# Altium PCB NewPower.PcbDoc
Units mil, origin at the board's own origin, x right, y up, seen from the top; angles counter-clockwise.
Board outline 2880 x 3365 mil, 2 copper layers (Top Layer, Bottom Layer); 28 components, 17 nets, 80 pads, 17 vias.
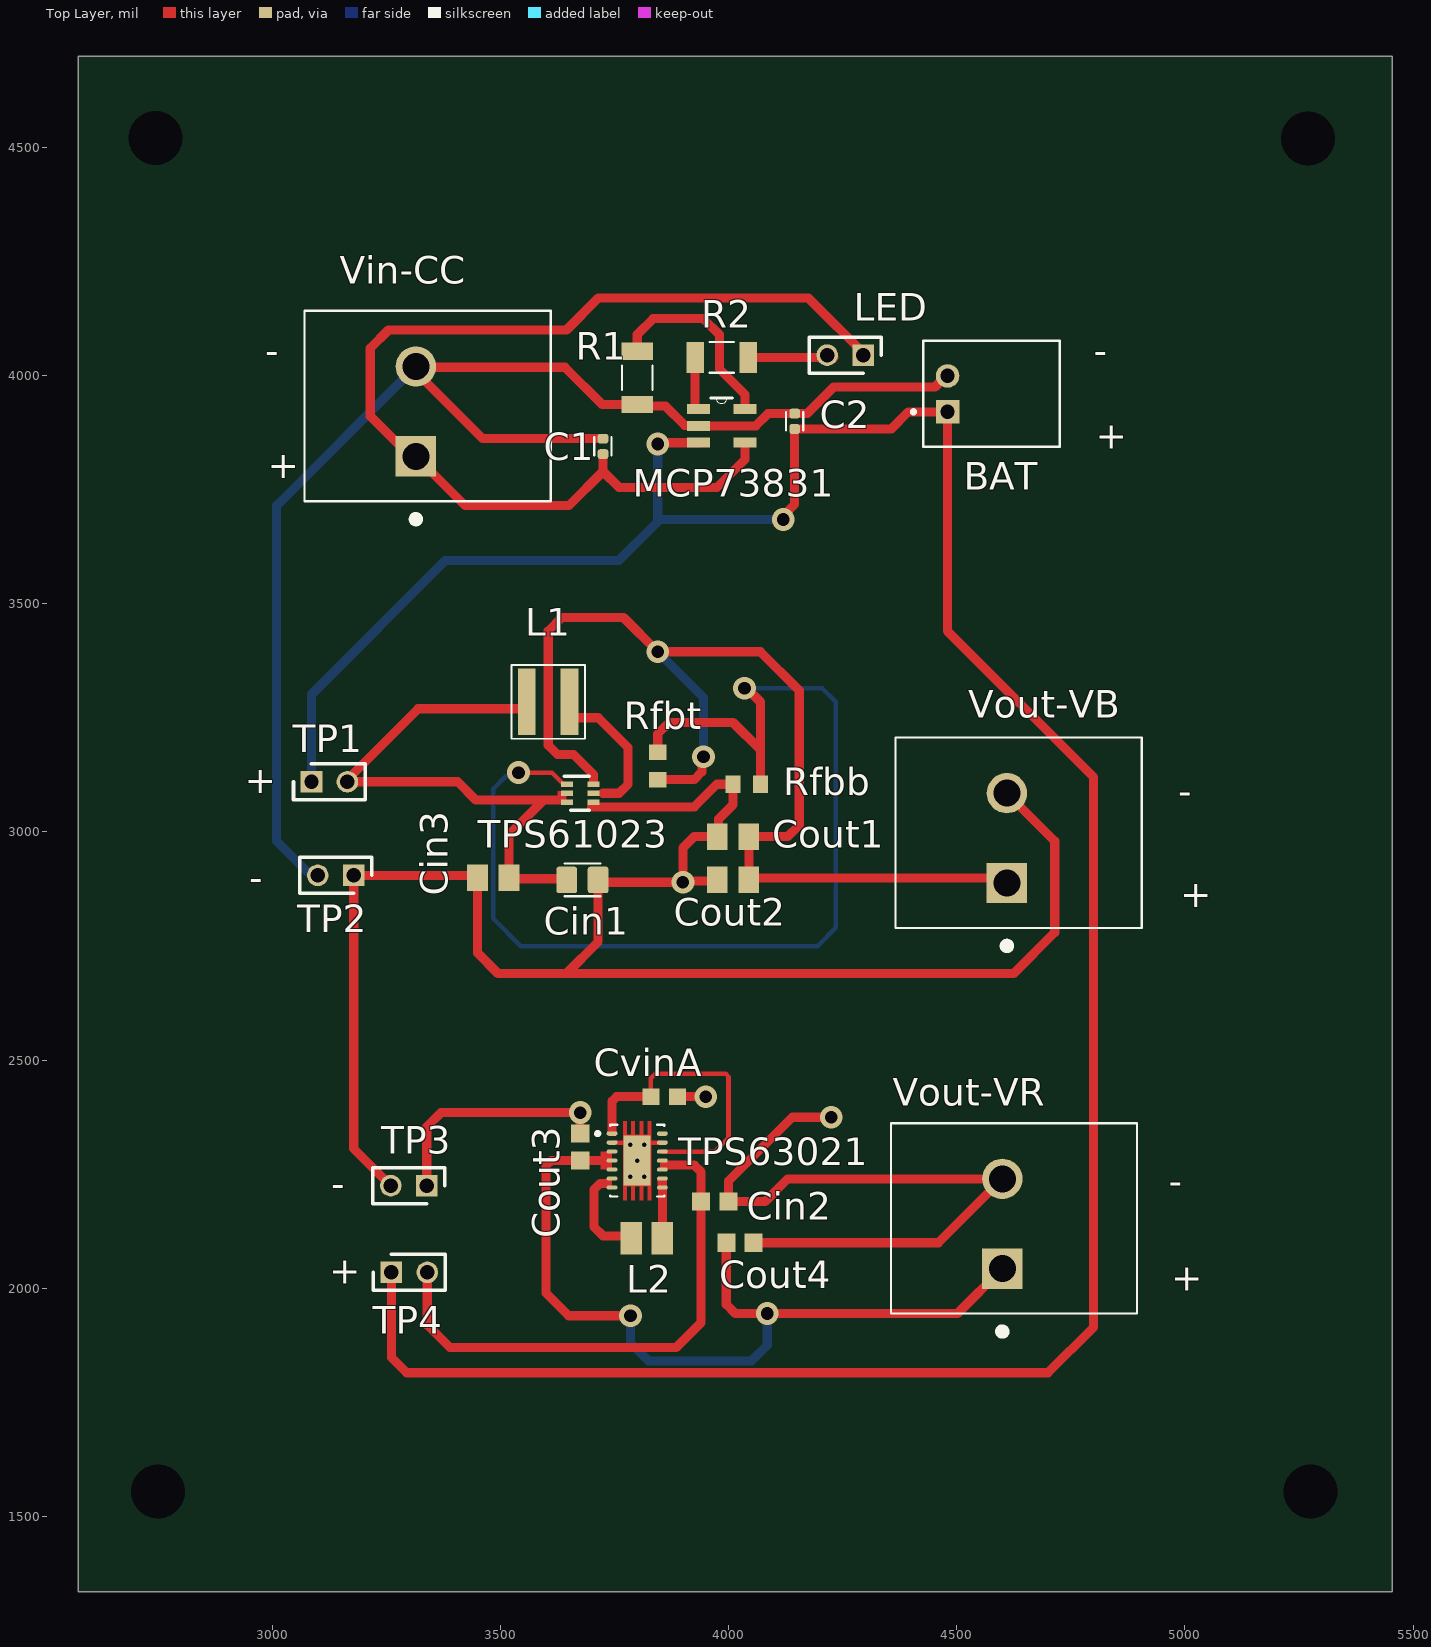
[diagram p0: Top Layer view]
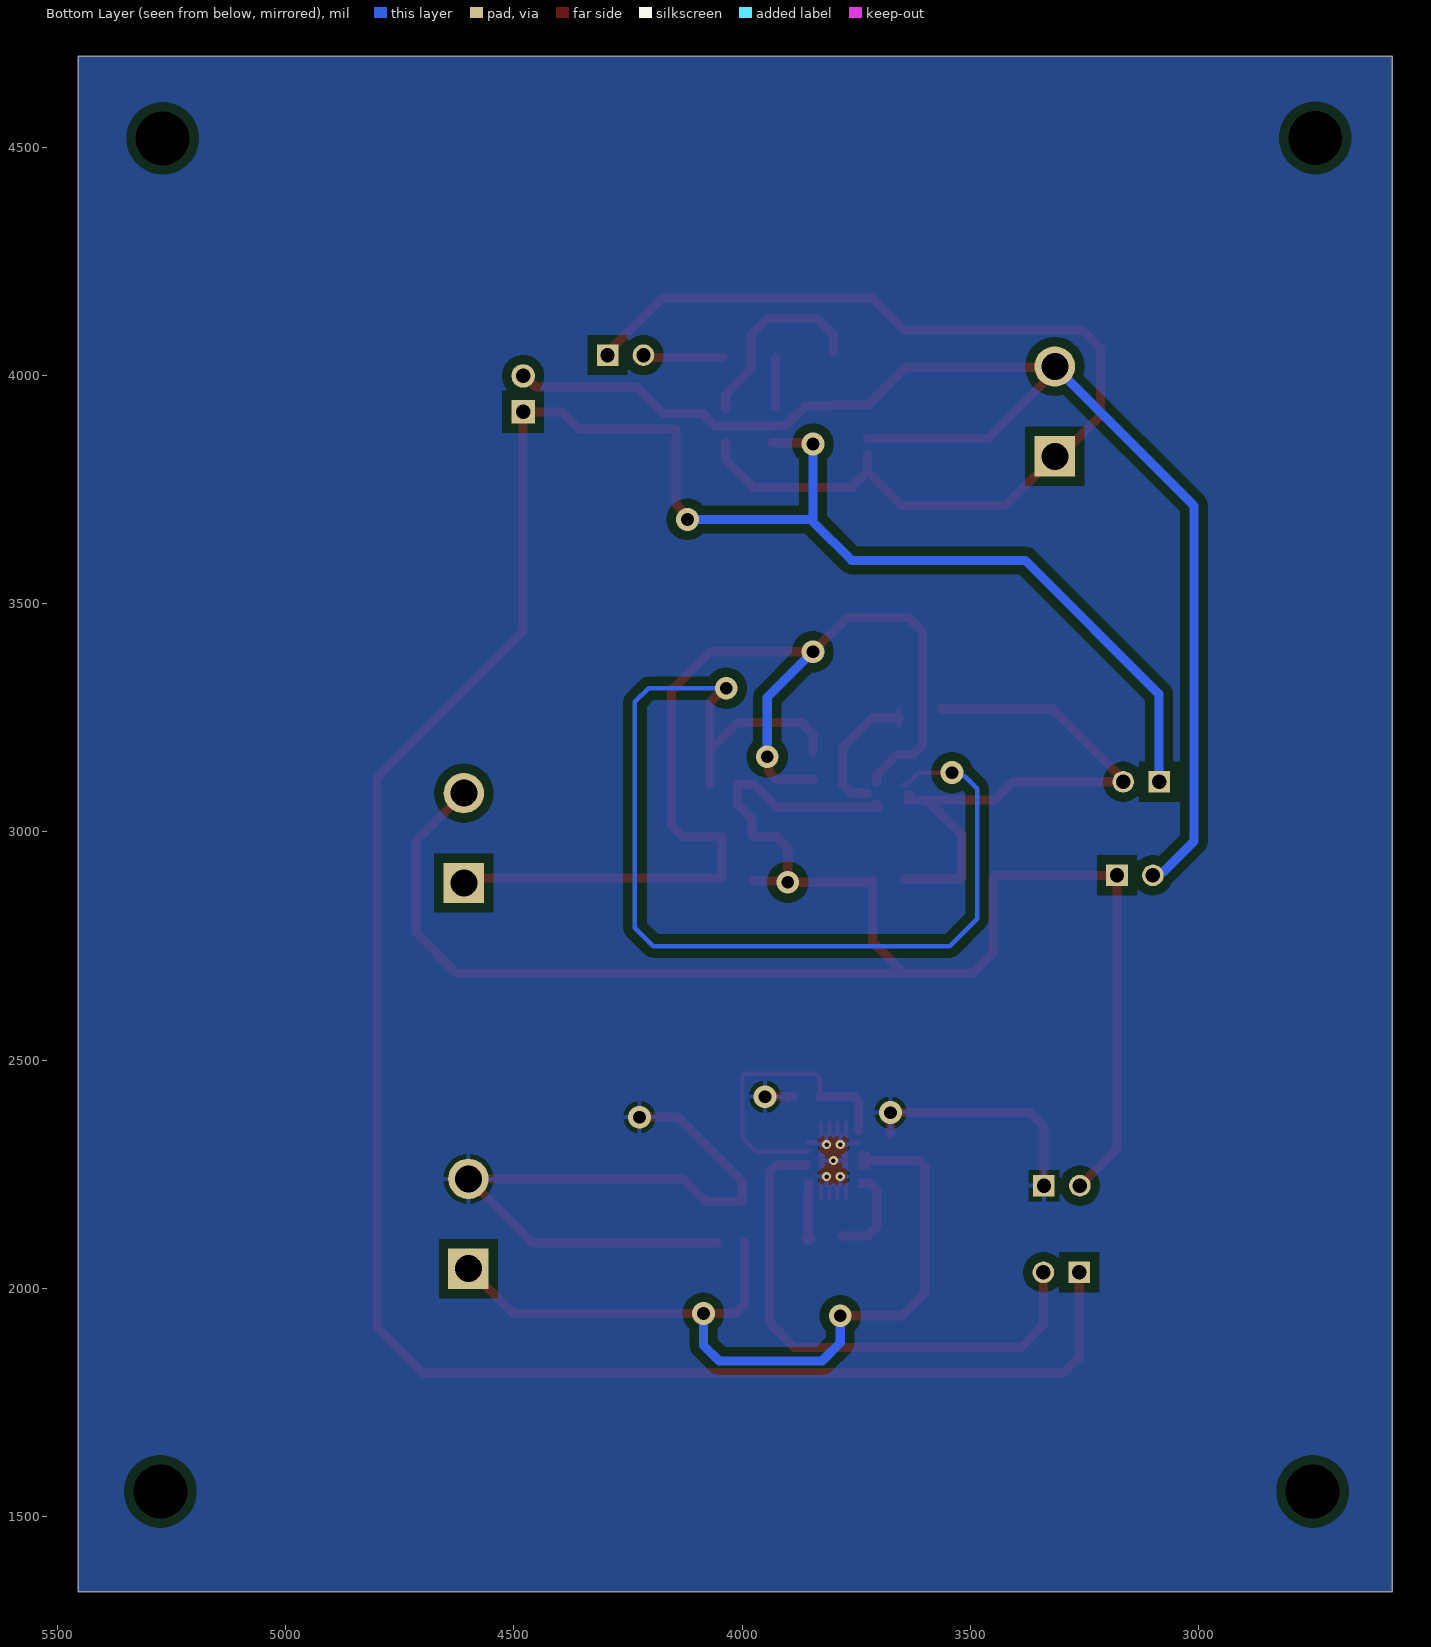
[diagram p1: Bottom Layer view, seen from below]
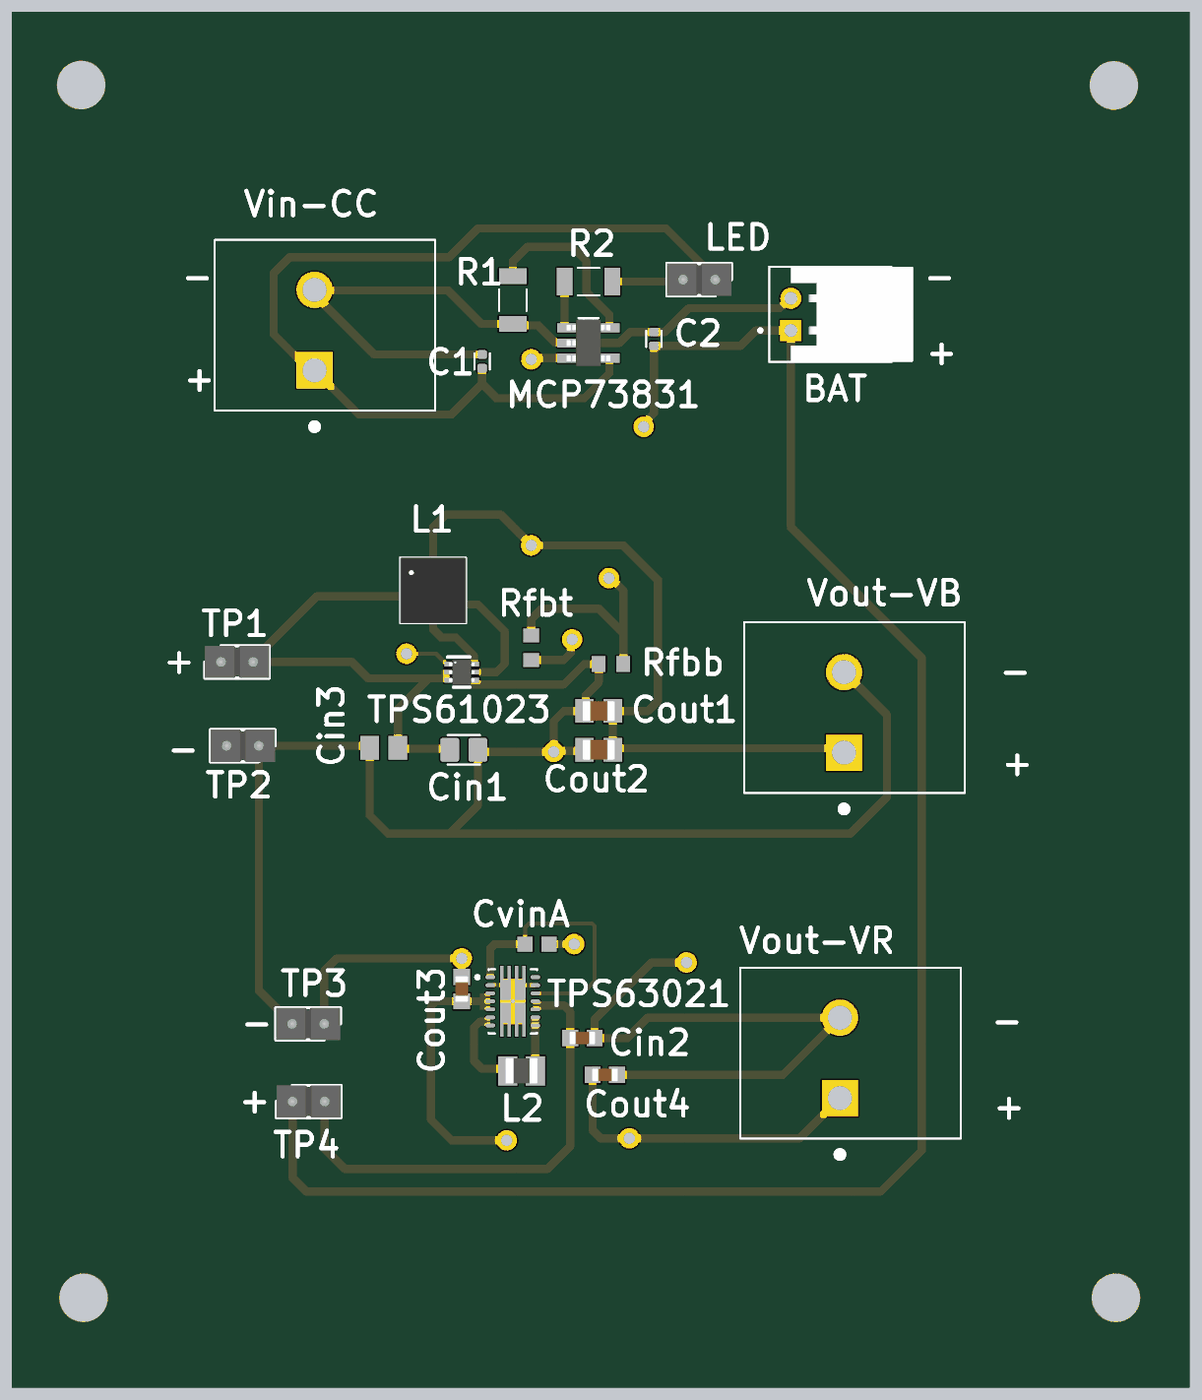
[diagram p2: 3D render of the assembled board from above, using the file's embedded part models]

## Layer stack, top to bottom
Top Solder: solder mask 0.4, Solder Resist, Dk 3.5
Top Layer: signal copper 1.4
Dielectric 1: dielectric 12.6, FR-4, Dk 4.8
Bottom Layer: signal copper 1.4
Bottom Solder: solder mask 0.4, Solder Resist, Dk 3.5

## Board outline
2575,1335 5455,1335 5455,4700 2575,4700

## Design rules (kind name [scope] priority, off if disabled: settings)
Clearance Clearance_POLY [InNamedPolygon('GND_L02_P000')] p1: gap=20 ignorepadtopadclearanceinfootprint=FALSE
Clearance [All] p2: gap=5 ignorepadtopadclearanceinfootprint=FALSE
PolygonConnect [All] p1: connectstyle=Relief reliefconductorwidth=10 reliefentries=4 polygonreliefangle="90 Angle" airgapwidth=10
RoutingVias [All] p1: holewidth=28 width=50 viastyle="Through Hole" minholewidth=28 minwidth=50 maxholewidth=28 maxwidth=50
SolderMaskExpansion [All] p1: expansion=4 istentingtop=FALSE
Width [All] p1: maxlimit=200 minlimit=5 preferedwidth=10
30 further rules are at their usual default settings.

## Components (designator, comment, footprint, x,y, rotation, side; value= is the part's Value field where it differs from the comment)
BAT "" JST_S2B-PH-K-S(LF)(SN) 4480,3960 r90 top
C1 "4.7uF" CAPC1005X55N 3725,3845 r90 top
C2 "4.7uF" CAPC1005X55N 4145,3900 r90 top
Cin1 "10uF" CAPC2012X88N#1 3680,2895 r0 top
Cin2 "22uF" CAPC1608X100N 3970,2190.39 r180 top
Cin3 "" CAPC2012X88N#2 3484.45,2900 r180 top
Cout1 "15uF" CAPC2012X145N 4010,2990 r0 top
Cout2 "15uF" CAPC2012X145N 4010,2895 r0 top
Cout3 "22uF" CAPC1608X100N 3675,2309.88 r270 top
Cout4 "22uF" CAPC1608X100N 4025.12,2100 r180 top
CvinA "100nF" CAPC1608X90N 3859.06,2420 r180 top
L1 "1uH" 74438357010 3605,3285 r0 top
L2 "1uH" INDC2016X100N 3821.14,2110 r180 top
LED "" HDRV2W60P0X200_1X2_400X200X525P 4295,4045 r180 top
MCP73831 "" SOT95P280X145-5N 3985,3890 r0 top
R1 "2 kOhm" RESC3116X65N 3800,3995 r90 top
R2 "470 Ohm" RESC3116X65N 3985,4040 r180 top
Rfbb "100kohm" RESC1508X50N 4040,3105 r0 top
Rfbt "732kohm" RESC1508X50N 3845,3145 r90 top
TP1 "+" HDRV2W60P0X200_1X2_400X200X525P 3086.26,3110 r0 top
TP2 "-" HDRV2W60P0X200_1X2_400X200X525P 3178.74,2905 r180 top
TP3 "-" HDRV2W60P0X200_1X2_400X200X525P 3338.74,2225 r180 top
TP4 "+" HDRV2W60P0X200_1X2_400X200X525P 3261.26,2035 r0 top
TPS61023 "" DRL0006A 3675,3085 r0 top
TPS63021 "" IC_TPS63021DSJR 3800,2280 r0 top
Vin-CC "" WE_691211720002 3315,3921.57 r90 top
Vout-VB "" WE_691211720002 4610,2986.57 r90 top
Vout-VR "" WE_691211720002 4600,2141.57 r90 top

## Footprints (in the part's own frame and the unit in brackets; to place one, negate y for a bottom-side part, rotate by r counter-clockwise, add the part's x,y. Pads: shape width x height; smd on the part's side, far side on the other; paste and mask are expansions set on the pad)
74438357010 [mm]
  rect 0.98x3.7 smd: 1(-1.185,0) 2(1.185,0)
  silkscreen extent -2.05,-2.05 2.05,2.05, body extent -2.05,-2.05 2.05,2.05, height 3.1
CAPC1005X55N [mm]
  rrect53% 0.54x0.6 smd: 1(-0.43,0) 2(0.43,0)
  silkscreen extent -0.5,-0.48 0.5,0.48
CAPC1608X90N [mm]
  rect 0.95x0.93 smd: 1(-0.738,0) 2(0.738,0)
CAPC1608X100N [mm]
  rect 1x1.02 smd: 1(-0.759,0) 2(0.759,0)
  body extent -0.8,-0.4 0.8,0.4, height 1
CAPC2012X88N#1 [mm]
  rrect25% 1.16x1.47 smd: 1(-0.875,0) 2(0.875,0)
  silkscreen extent -1,-0.91 1,0.91
CAPC2012X88N#2 [mm]
  rect 1.16x1.47 smd: 1(-0.875,0) 2(0.875,0)
CAPC2012X145N [mm]
  rect 1.15x1.47 smd: 1(-0.88,0) 2(0.88,0)
  body extent -1,-0.63 1,0.63, height 1.45
DRL0006A [mm]
  rect 0.67x0.3 smd: 1(-0.74,0.5) 2(-0.74,0) 3(-0.74,-0.5) 4(0.74,-0.5) 5(0.74,0) 6(0.74,0.5)
  silkscreen extent -0.89,-0.94 0.51,0.94, body extent -0.8,-0.8 0.8,0.8, height 0.6
HDRV2W60P0X200_1X2_400X200X525P [mm]
  rect 1.2x1.2 hole 0.8: 1(0,0)
  round 1.2 hole 0.8: 2(2,0)
  silkscreen extent -1,-1 3,1, body extent -1,-1 3,1, height 5.25
IC_TPS63021DSJR [mm]
  oval 0.6x0.24 smd mask+0: 1(-1.4,1.5) 2(-1.4,1) 3(-1.4,0.5) 4(-1.4,0) 5(-1.4,-0.5) 6(-1.4,-1) 7(-1.4,-1.5) 8(1.4,-1.5) 9(1.4,-1) 10(1.4,-0.5) 11(1.4,0) 12(1.4,0.5) 13(1.4,1) 14(1.4,1.5)
  rect 1.5x2.8 smd paste-2 mask+0: 15(0,0)
  Top Layer region: 0.79,-2.2 0.59,-2.2 0.59,-1.425 0.33,-1.425 0.33,-2.2 0.13,-2.2 0.13,-1.425 -0.13,-1.425 -0.13,-2.2 -0.33,-2.2 -0.33,-1.425 -0.59,-1.425 -0.59,-2.2 -0.79,-2.2 -0.79,2.2 -0.59,2.2 -0.59,1.425 -0.33,1.425 -0.33,2.2 -0.13,2.2 -0.13,1.425 0.13,1.425 0.13,2.2 0.33,2.2 0.33,1.425 0.59,1.425 0.59,2.2 0.79,2.2
  silkscreen extent -2.3,-2 1.5,2
INDC2016X100N [mm]
  rect 1.2x1.82 smd: 1(-0.86,0) 2(0.86,0)
  body extent -1,-0.8 1,0.8, height 1
JST_S2B-PH-K-S(LF)(SN) [mm]
  rect 1.308x1.308 / inner round 1.308 / far side rect 1.308x1.308 hole 0.8: 1(-1,0)
  round 1.308 hole 0.8: 2(1,0)
  silkscreen extent -2.95,-6.25 2.95,2, body extent -2.95,-7.6 2.95,0, height 4.8
RESC1508X50N [mm]
  rect 0.86x0.98 smd: 1(-0.765,0) 2(0.765,0)
RESC3116X65N [mm]
  rect 0.97x1.73 smd: 1(-1.48,0) 2(1.48,0)
  silkscreen extent -0.67,-0.85 0.67,0.85
SOT95P280X145-5N [mil]
  rect 50x22 smd: 1(-51,37) 2(-51,0) 3(-51,-37) 4(51,-37) 5(51,37)
  silkscreen extent -24,49 24,61, body extent -53,-57 53,57, height 57
WE_691211720002 [mm]
  rect 2.25x2.25 hole 1.5: 1(-2.5,0)
  round 2.25 hole 1.5: 2(2.5,0)
  silkscreen extent -6.2,-7.5 5.6,6.2

## Part data
BAT: library part S2B-PH-K-S(LF)(SN), "Connector Header Through Hole, Right Angle 2 position", Package=None, Availability="In Stock", Check_prices=https://www.snapeda.com/parts/S2B-PH-K-S(LF)(SN)/JST+Sales+America+Inc./view-part/?ref=eda, MF="JST Sales America Inc.", MP=S2B-PH-K-S(LF)(SN), Price=None, Purchase-URL=https://pricing.snapeda.com/search/part/S2B-PH-K-S(LF)(SN)/?ref=eda, SnapEDA_Link=https://www.snapeda.com/parts/S2B-PH-K-S(LF)(SN)/JST+Sales+America+Inc./view-part/?ref=snap
C1 C2: library part CL05A475MP5NRNC, "4.7ÂµF Â±20% 10V Ceramic Capacitor X5R 0402 (1005 Metric)", Package="0402 Samsung", Digi-Key_Part_Number=1276-1482-1-ND, DigiKey-Purchase-URL=https://snapeda.com/shop?store=DigiKey&id=2751704, MF="Samsung Electro-Mechanics", MP=CL05A475MP5NRNC, SnapEDA_Link=https://www.snapeda.com/parts/CL05A475MP5NRNC/Samsung%20Electro-Mechanics/view-part/2751704/?ref=snap
Cin1 Cin3: library part C0805C106K8PACTU, "10Î¼F Â± 10% Capacitor de cerÃ¢mica 10V X5R 0805 _2012 MÃ©trico_", Package="0805 KEMET", Digi-Key_Part_Number=399-4925-1-ND, Digi-Key_Purchase_URL=https://www.digikey.com.br/product-detail/en/kemet/C0805C106K8PACTU/399-4925-1-ND/1090920?utm_source=snapeda&utm_medium=aggregator&utm_campaign=symbol, MF=KEMET, MP=C0805C106K8PACTU, SnapEDA_Link=https://www.snapeda.com/parts/C0805C106K8PACTU/KEMET/view-part/1479348/?ref=snap
Cin2 Cout3 Cout4: library part GRM188R60J226MEA0D, "SMD Capacitor X5R_EIA_ with Capacitance: 22uF Tol. 20%. Rated Voltage: 6.3Vdc", Package="1608 Murata", Digi-Key_Part_Number=490-7611-1-ND, Digi-Key_Purchase_URL=https://www.digikey.com/product-detail/en/murata-electronics/GRM188R60J226MEA0D/490-7611-1-ND/4280544?utm_source=snapeda&utm_medium=aggregator&utm_campaign=symbol, MF=Murata, MP=GRM188R60J226MEA0D, SnapEDA_Link=https://www.snapeda.com/parts/GRM188R60J226MEA0D/Murata/view-part/4379901/?ref=snap
Cout1 Cout2: library part C2012X5R1V156M125AC, "15ÂµF Â±20% 35V Ceramic Capacitor X5R 0805 (2012 Metric)", Package="2012 TDK", Check_prices=https://www.snapeda.com/parts/C2012X5R1V156M125AC/TDK-Lambda+Americas+Inc/view-part/?ref=eda, MF=TDK, MP=C2012X5R1V156M125AC, Purchase-URL=https://pricing.snapeda.com/search/part/C2012X5R1V156M125AC/?ref=eda, SnapEDA_Link=https://www.snapeda.com/parts/C2012X5R1V156M125AC/TDK-Lambda+Americas+Inc/view-part/?ref=snap
CvinA: library part EMK107B7104KA-T, "0.1ÂµF Â±10% 16V Ceramic Capacitor X7R 0603 _1608 Metric_", Package="1608 Taiyo Yuden", Availability=Unavailable, MF="Taiyo Yuden", MP=EMK107B7104KA-T, Price=None, SnapEDA_Link=https://www.snapeda.com/parts/EMK107B7104KA-T/Taiyo%20Yuden/view-part/588111/?ref=snap
L1: library part 74438357010, "Inductor", Manufacturer_Name="Wurth Elektronik", Mouser Part Number=710-74438357010, Datasheet Link=https://katalog.we-online.de/pbs/datasheet/74438357010.pdf, Height=3.1mm, Manufacturer_Part_Number=74438357010, Mouser Price/Stock=https://www.mouser.co.uk/ProductDetail/Wurth-Elektronik/74438357010?qs=AQlKX63v8RstGPuQmrueWg%3D%3D
L2: library part DFE201610E-1R0M=P2, "Inductor with Inductance: 1uH Tol. +/-20%, Package: 0806 (2016)", Package="0806-2 Murata", Check_prices=https://www.snapeda.com/parts/DFE201610E-1R0M=P2/Murata+Electronics+North+America/view-part/?ref=eda, Digi-Key_Part_Number=490-18106-2-ND, MF="Murata Electronics", MP=DFE201610E-1R0M=P2, Purchase-URL=https://pricing.snapeda.com/search/part/DFE201610E-1R0M=P2/?ref=eda, SnapEDA_Link=https://www.snapeda.com/parts/DFE201610E-1R0M=P2/Murata+Electronics+North+America/view-part/?ref=snap
LED TP1 TP2 TP3 TP4: library part M22-2510205, "Connector", Manufacturer_Name=Harwin, Mouser Part Number=855-M22-2510205, Datasheet Link=https://cdn.harwin.com/pdfs/M22-251.pdf, Height=5.25mm, Manufacturer_Part_Number=M22-2510205, Mouser Price/Stock=https://www.mouser.co.uk/ProductDetail/Harwin/M22-2510205?qs=vF78I%252BjhbY%2FHssMovH2Mxg%3D%3D
MCP73831: library part MCP73831T-2ACI/OT, "Charger IC Lithium Ion/Polymer SOT-23-5", Package="SOT-23 Microchip", Availability="In Stock", Check_prices=https://www.snapeda.com/parts/MCP73831T-2ACI/OT/Microchip/view-part/?ref=eda, MF=Microchip, MP=MCP73831T-2ACI/OT, Price=None, Purchase-URL=https://pricing.snapeda.com/search/part/MCP73831T-2ACI/OT/?ref=eda, SnapEDA_Link=https://www.snapeda.com/parts/MCP73831T-2ACI/OT/Microchip/view-part/?ref=snap
R1: library part RC1206FR-072KL, Package="3116 Yageo", Digi-Key_Part_Number=311-2.00KFRCT-ND, Digi-Key_Purchase_URL=https://www.digikey.com/product-detail/en/yageo/RC1206FR-072KL/311-2.00KFRCT-ND/731559?utm_source=snapeda&utm_medium=aggregator&utm_campaign=symbol, MF=Yageo, MP=RC1206FR-072KL, SnapEDA_Link=https://www.snapeda.com/parts/RC1206FR-072KL/Yageo/view-part/1118481/?ref=snap
R2: library part RC1206FR-07470RL, "470 Ohms Â±1% 0.25W, 1/4W Chip Resistor 1206 (3216 Metric) Thick Film", Package="3116 Yageo", Check_prices=https://www.snapeda.com/parts/RC1206FR-07470RL/Yageo/view-part/422506/?ref=eda, MF=Yageo, MP=RC1206FR-07470RL, Purchase-URL=https://pricing.snapeda.com/search/part/RC1206FR-07470RL/?ref=eda, SnapEDA_Link=https://www.snapeda.com/parts/RC1206FR-07470RL/Yageo/view-part/422506/?ref=snap
Rfbb: library part CRCW0603100KFKEA, "100 kOhms Â±1% 0.1W, 1/10W Chip Resistor 0603 (1608 Metric) Automotive AEC-Q200 Thick Film", Package="1508 Vishay", Availability=Unavailable, MF=Vishay, MP=CRCW0603100KFKEA, Price=None, SnapEDA_Link=https://www.snapeda.com/parts/CRCW0603100KFKEA/Vishay%20Dale/view-part/53276/?ref=snap
Rfbt: library part CRCW0603732KFKEA, "Res Thick Film 0603 732K Ohm 1% 1/10W Â±100ppm/Â°C Molded SMD SMD Paper T/R", Package=None, Availability=Unavailable, MP=CRCW0603732KFKEA, Price=None
TPS61023: library part TPS61023DRLR, "3-A boost converter with 0.5-V ultra-low input voltage 6-SOT-5X3 -40 to 125", Package="SOT-5X3-6 Texas Instruments", Availability=Warning, Check_prices=https://www.snapeda.com/parts/TPS61023DRLR/Texas%20Instruments/view-part/4653127/?ref=eda, MF="Texas Instruments", MP=TPS61023DRLR, Price=None, Purchase-URL=https://pricing.snapeda.com/search/part/TPS61023DRLR/?ref=eda, SnapEDA_Link=https://www.snapeda.com/parts/TPS61023DRLR/Texas%20Instruments/view-part/4653127/?ref=snap
TPS63021: library part TPS63021DSJR, "High Efficiency Single Inductor Buck-Boost Converter with 4A Switch  <a href=\"https://snapeda.com/parts/TPS63021DSJR/Texas%20Instruments/view-part/?ref=eda\">Buy Part</a> <a href=\"https://snapeda.com/parts/TPS63021DSJR/Texas%20Instruments/view-part/?ref=eda\">Check prices</a> <a href=\"https://snapeda.com/parts/TPS63021DSJR/Texas%20Instruments/view-part/?ref=eda\">Check prices</a>", Package=None, Availability=Unavailable, MP=TPS63021DSJR, Price=None
Vin-CC Vout-VB Vout-VR: library part 691211720002, "2 Position Wire to Board Terminal Block 45Â° (135Â°) Angle with Board 0.197 (5.00mm) Through Hole", Package=None, DigiKey-Purchase-URL=https://snapeda.com/shop?store=DigiKey&id=1741219, MF="Wurth Electronics", Mouser-Purchase-URL=https://snapeda.com/shop?store=Mouser&id=1741219, MP=691211720002, SnapEDA_Link=https://www.snapeda.com/parts/691211720002/Wurth%20Electronics%20Inc./view-part/1741219/?ref=snap

## Free pads (board coordinates)
  round 60 hole 118.11: 2(2744.19,4520.81) 2(2750,1555) 2(5270,4520) 2(5275,1555)

## Via types
v1: diameter 50, hole 28, Top Layer to Bottom Layer, 12 vias
v2: diameter 20, hole 10, Top Layer to Bottom Layer, 5 vias

## Nets (pads, with @x,y where several pads share a name; then routed paths per layer and width w, separated by ;. In a path a pad name is that pad's centre, name@x,y a point inside that pad or via, vN(x,y) a via of type N, cw(c..) or ccw(c..) an arc to the next point about the centre after c; other vN are vias at no path point)
GND: Cin2.1 Cout3.1 Cout4.1 CvinA.1 TP3.1 TPS63021.2 TPS63021.13 TPS63021.15 Vout-VR.2 | length 2234.9
  Top Layer w9.45: TPS63021.2 TPS63021.15@3780.63,2319.37
  Top Layer w10: TPS63021.15@3780.63,2319.37 v2(3785,2315) ; v2(3815,2315) 3819.37,2319.37 TPS63021.13 ; CvinA.1 CvinA.1@3898.11,2410 ; Cin2.1@3999.88,2190 Cin2.1
  Top Layer w20: TP3.1 3338.74,2353.74 3370,2385 v1(3675,2385) Cout3.1 ; CvinA.1 v1(3950,2420) ; Cin2.1@3999.88,2190 4080,2190 4130,2240 Vout-VR.2 4460,2100 Cout4.1 ; Cin2.1 3999.88,2234.88 4140,2375 v1(4225,2375)
  other v2: 3785,2245 3815,2245 3800,2280
NetBAT_1: BAT.1 C2.1 MCP73831.3 TP1.1 TP4.1 | length 6114.7
  Top Layer w20: TP4.1 3261.26,1848.74 3295,1815 4700,1815 4800,1915 4800,3120 4480,3440 BAT.1 4394.16,3920.63 4356.6,3883.07 C2.1 4145,3718.12 4120,3693.12 v1(4120,3685) ; v1(3845,3850) 3848,3853 MCP73831.3
  Bottom Layer w20: TP1.1 3086.26,3301.26 3380,3595 3760,3595 3845,3680 v1(3845,3850) ; 3850,3685 v1(4120,3685)
NetBAT_2: BAT.2 C1.2 C2.2 MCP73831.2 R1.1 TP2.2 Vin-CC.2 | length 3045.7
  Top Layer w20: C1.2 3461.5,3861.93 3305,4018.43 3641.57,4018.43 3723.27,3936.73 R1.1 3803.65,3933.08 3861.92,3933.08 3904,3891 3933,3891 MCP73831.2 4060,3890 4086.93,3916.93 C2.2 4172.54,3916.93 4230.61,3975 4452.54,3975 4476.91,3999.37 BAT.2
  Bottom Layer w10: TP2.2@3077.87,2912.13 3092.87,2912.13 TP2.2
  Bottom Layer w20: TP2.2@3077.87,2912.13 3010,2980 3010,3715 Vin-CC.2
NetC1_1: C1.1 LED.1 MCP73831.4 Vin-CC.1 | length 2386.1
  Top Layer w20: Vin-CC.1@3311.57,3815 3215,3911.57 3215,4060 3255,4100 3645,4100 3715,4170 4175,4170 LED.1@4305,4040 ; Vin-CC.1 3423.15,3715 3650,3715 3725,3790 ; C1.1 3725,3790 ; MCP73831.4 4036,3816 3975,3755 3760,3755 3725,3790
NetCin1_1: Cin1.1 Cin3.1 L1.1 TP1.2 TPS61023.2 TPS61023.3 | length 1286.9
  Top Layer w10: TP1.2@3160,3110 TP1.2 ; Cin1.1 Cin1.1@3645.87,2895.31
  Top Layer w20: TP1.2@3160,3110 3320,3270 L1.1@3563.35,3270 ; TP1.2 3406.44,3110 3446.44,3070 3595,3070 ; 3630,3070 3595,3070 ; Cin1.1 3643.05,2897.5 3521.4,2897.5 Cin3.1 3518.9,2993.9 3595,3070
NetCin1_2: Cin1.2 Cin3.2 Cout1.1 Cout2.1 Rfbb.1 TP2.1 TP3.2 TPS61023.4 Vout-VB.2 | length 3962.2
  Top Layer w10: Cin3.2@3445,2905 Cin3.2 ; TPS61023.4 TPS61023.4@3711.42,3065.32 ; Cin1.2 Cin1.2@3719.45,2890 ; Cout1.1 Cout1.1@3978.08,2992.72
  Top Layer w20: TP3.2 3178.74,2306.26 TP2.1 Cin3.2@3445,2905 ; Cin3.2 3450,2735 3495,2690 3645,2690 ; 3700,3055 3925,3055 3974.67,3104.67 4009.55,3104.67 Rfbb.1 4009.88,3059.88 3978.08,3028.08 Cout1.1@3978.08,2992.72 ; Cin1.2 3714.45,2759.45 3645,2690 ; Cin1.2@3719.45,2890 v1(3900,2890) ; Cout2.1 3972.85,2892.5 3902.5,2892.5 v1(3900,2890) ; Cout1.1 3925,2990 3900,2965 v1(3900,2890) ; Vout-VB.2 4715,2980 4715,2780 4625,2690 3645,2690
  Bottom Layer w10: Vout-VB.2@4600,3095 Vout-VB.2
NetCin2_2: Cin2.2 TP4.2 TPS63021.10 TPS63021.11 | length 1174.4
  Top Layer w20: TP4.2 3340,1920 3390,1870 3885,1870 3940.12,1925.12 Cin2.2@3940.12,2189.61 ; 3860,2270 3925,2270 3940.12,2254.88 Cin2.2@3940.12,2190
NetCout1_2: Cout1.2 Cout2.2 Rfbt.1 TPS61023.6 Vout-VB.1 | length 2523.2
  Top Layer w10: TPS61023.6 3709.09,3104.68 TPS61023.6@3710,3105.59 ; v1@3941.72,3161.72 v1(3945,3165)
  Top Layer w20: TPS61023.6@3704.35,3109.76 3704.35,3125.65 3660,3170 3625,3170 3605,3190 3605,3440 3635,3470 3770,3470 v1(3845,3395) 4070,3395 4155,3310 4155,3015 4130,2990 Cout1.2 4044.65,2898.93 4599.22,2898.93 Vout-VB.1 ; Rfbt.1 3924.88,3114.88 3941.72,3131.72 v1@3941.72,3161.72
  Bottom Layer w10: v1@3945,3155 v1(3945,3165)
  Bottom Layer w20: v1(3845,3395) 3945,3295 v1(3945,3165)
NetCout3_2: Cout3.2 Cout4.2 TPS63021.3 TPS63021.4 TPS63021.5 Vout-VR.1 | length 1867.7
  Top Layer w20: Cout3.2@3674.61,2280 3730,2280 ; Cout3.2 3611.72,2280 3600,2268.28 3600,1990 3650,1940 v1(3785,1940) ; Cout4.2 3995.24,1964.76 4015,1945 v1(4085,1945) 4501.85,1945 Vout-VR.1
  Bottom Layer w20: v1(3785,1940) 3785,1880.72 3825,1840.72 4050,1840.72 4085,1875.72 v1(4085,1945)
NetCvinA_2: CvinA.2 TPS63021.1 TPS63021.12 | length 662.3
  Top Layer w10: CvinA.2 3830,2460 3840,2470 3994.14,2470 4000,2464.14 4000,2330 3969.68,2299.68 TPS63021.12
  Top Layer w20: 3744.88,2345 3744.88,2409.88 3755,2420 CvinA.2
NetL1_2: L1.2 TPS61023.5 | length 333
  Top Layer w10: L1.2@3656.65,3230.75 3656.65,3250.37 L1.2@3656.65,3270
  Top Layer w20: L1.2@3656.65,3250.37 3714.63,3250.37 3780,3185 3780,3105 3760,3085 3725,3085
NetL2_1: L2.1 TPS63021.8 TPS63021.9 | length 111
  Top Layer w20: L2.1@3855.12,2110.12 TPS63021.8
  Top Layer w30: L2.1 L2.1@3855.12,2110.12
NetL2_2: L2.2 TPS63021.6 TPS63021.7 | length 196.3
  Top Layer w20: 3730,2230 3718.96,2230 3705,2216.04 3705,2135 3725,2115 L2.2@3781.14,2115
NetLED_2: LED.2 R2.1 | length 187.8
  Top Layer w20: R2.1 LED.2@4231.04,4040
NetMCP73831_1: MCP73831.1 R2.2 | length 116.8
  Top Layer w10: MCP73831.1@3926.73,3933 3932.73,3927 MCP73831.1
  Top Layer w20: MCP73831.1@3926.73,3933 R2.2
NetMCP73831_5: MCP73831.5 R1.2 | length 431.9
  Top Layer w20: R1.2 3800,4090 3835,4125 3945,4125 3980,4090 3980,4015 4036,3959 MCP73831.5
NetRfbb_2: Rfbb.2 Rfbt.2 TPS61023.1 | length 2497.4
  Top Layer w10: v1(3540,3130) 3613.27,3130 3638.58,3104.68 TPS61023.1 ; v1(4035,3315) v1@4040,3315
  Top Layer w20: Rfbt.2 3845,3215 3870,3240 4010,3240 4070.12,3179.88 ; v1@4040,3315 4070.12,3284.88 4070.12,3179.88 ; Rfbb.2 4070.12,3179.88
  Bottom Layer w10: v1(3540,3130) 3532.35,3122.35 3512.35,3122.35 3485,3095 3485,2810 3545,2750 4195,2750 4235,2790 4235,3285 4205,3315 v1(4035,3315)
pads on no net: TPS63021.14
copper on no net: | length 15.3
  Top Layer w10: 2744.19,1560.81 2750,1555 ; 5270,4545 5275,4540

## Polygon pours and split planes (outlines as drawn)
GND on Bottom Layer "GND_L02_P000" (solid, remove dead copper, pour order 0): 2575,1335 5455,1335 5455,4700 2575,4700

## Other copper
Top Layer:
  rectangle net NetCin1_1: 3625,3060 3645,3090
  rectangle net NetCout3_2: 3720,2260 3744.88,2299.68
  rectangle net NetCin2_2: 3850,2260 3880,2280
  rectangle net NetL2_1: 3845,2220 3865,2240
  rectangle net NetL2_2: 3730,2220 3744.88,2240.63

## Silkscreen, mask and mechanical layers (free items; w line width, h text height)
Top Overlay:
  text "-" at 2985,4025.01 h60
  text "-" at 4800,4025.01 h60
  text "+" at 4805,3840 h60
  text "+" at 2990,3775 h60
  text "+" at 2940,3085 h60
  text "-" at 4985,3060.01 h60
  text "-" at 2950,2870.01 h60
  text "+" at 4990,2835 h60
  text "-" at 4965,2205.01 h60
  text "-" at 3130,2200.01 h60
  text "+" at 3125,2010 h60
  text "+" at 4970,1995 h60